# Altium PCB FCM_Integrated.PcbDoc (part 3 of 3)
Units mil, origin at the board's own origin, x right, y up, seen from the top; angles counter-clockwise.
Board outline 5855 x 4354 mil, 4 copper layers (Top Layer, Power, Ground, Bottom Layer), stack 23.756 mil thick; 164 components, 92 nets, 619 pads, 86 vias.
Unrouted connection lines stored in the file: 241.
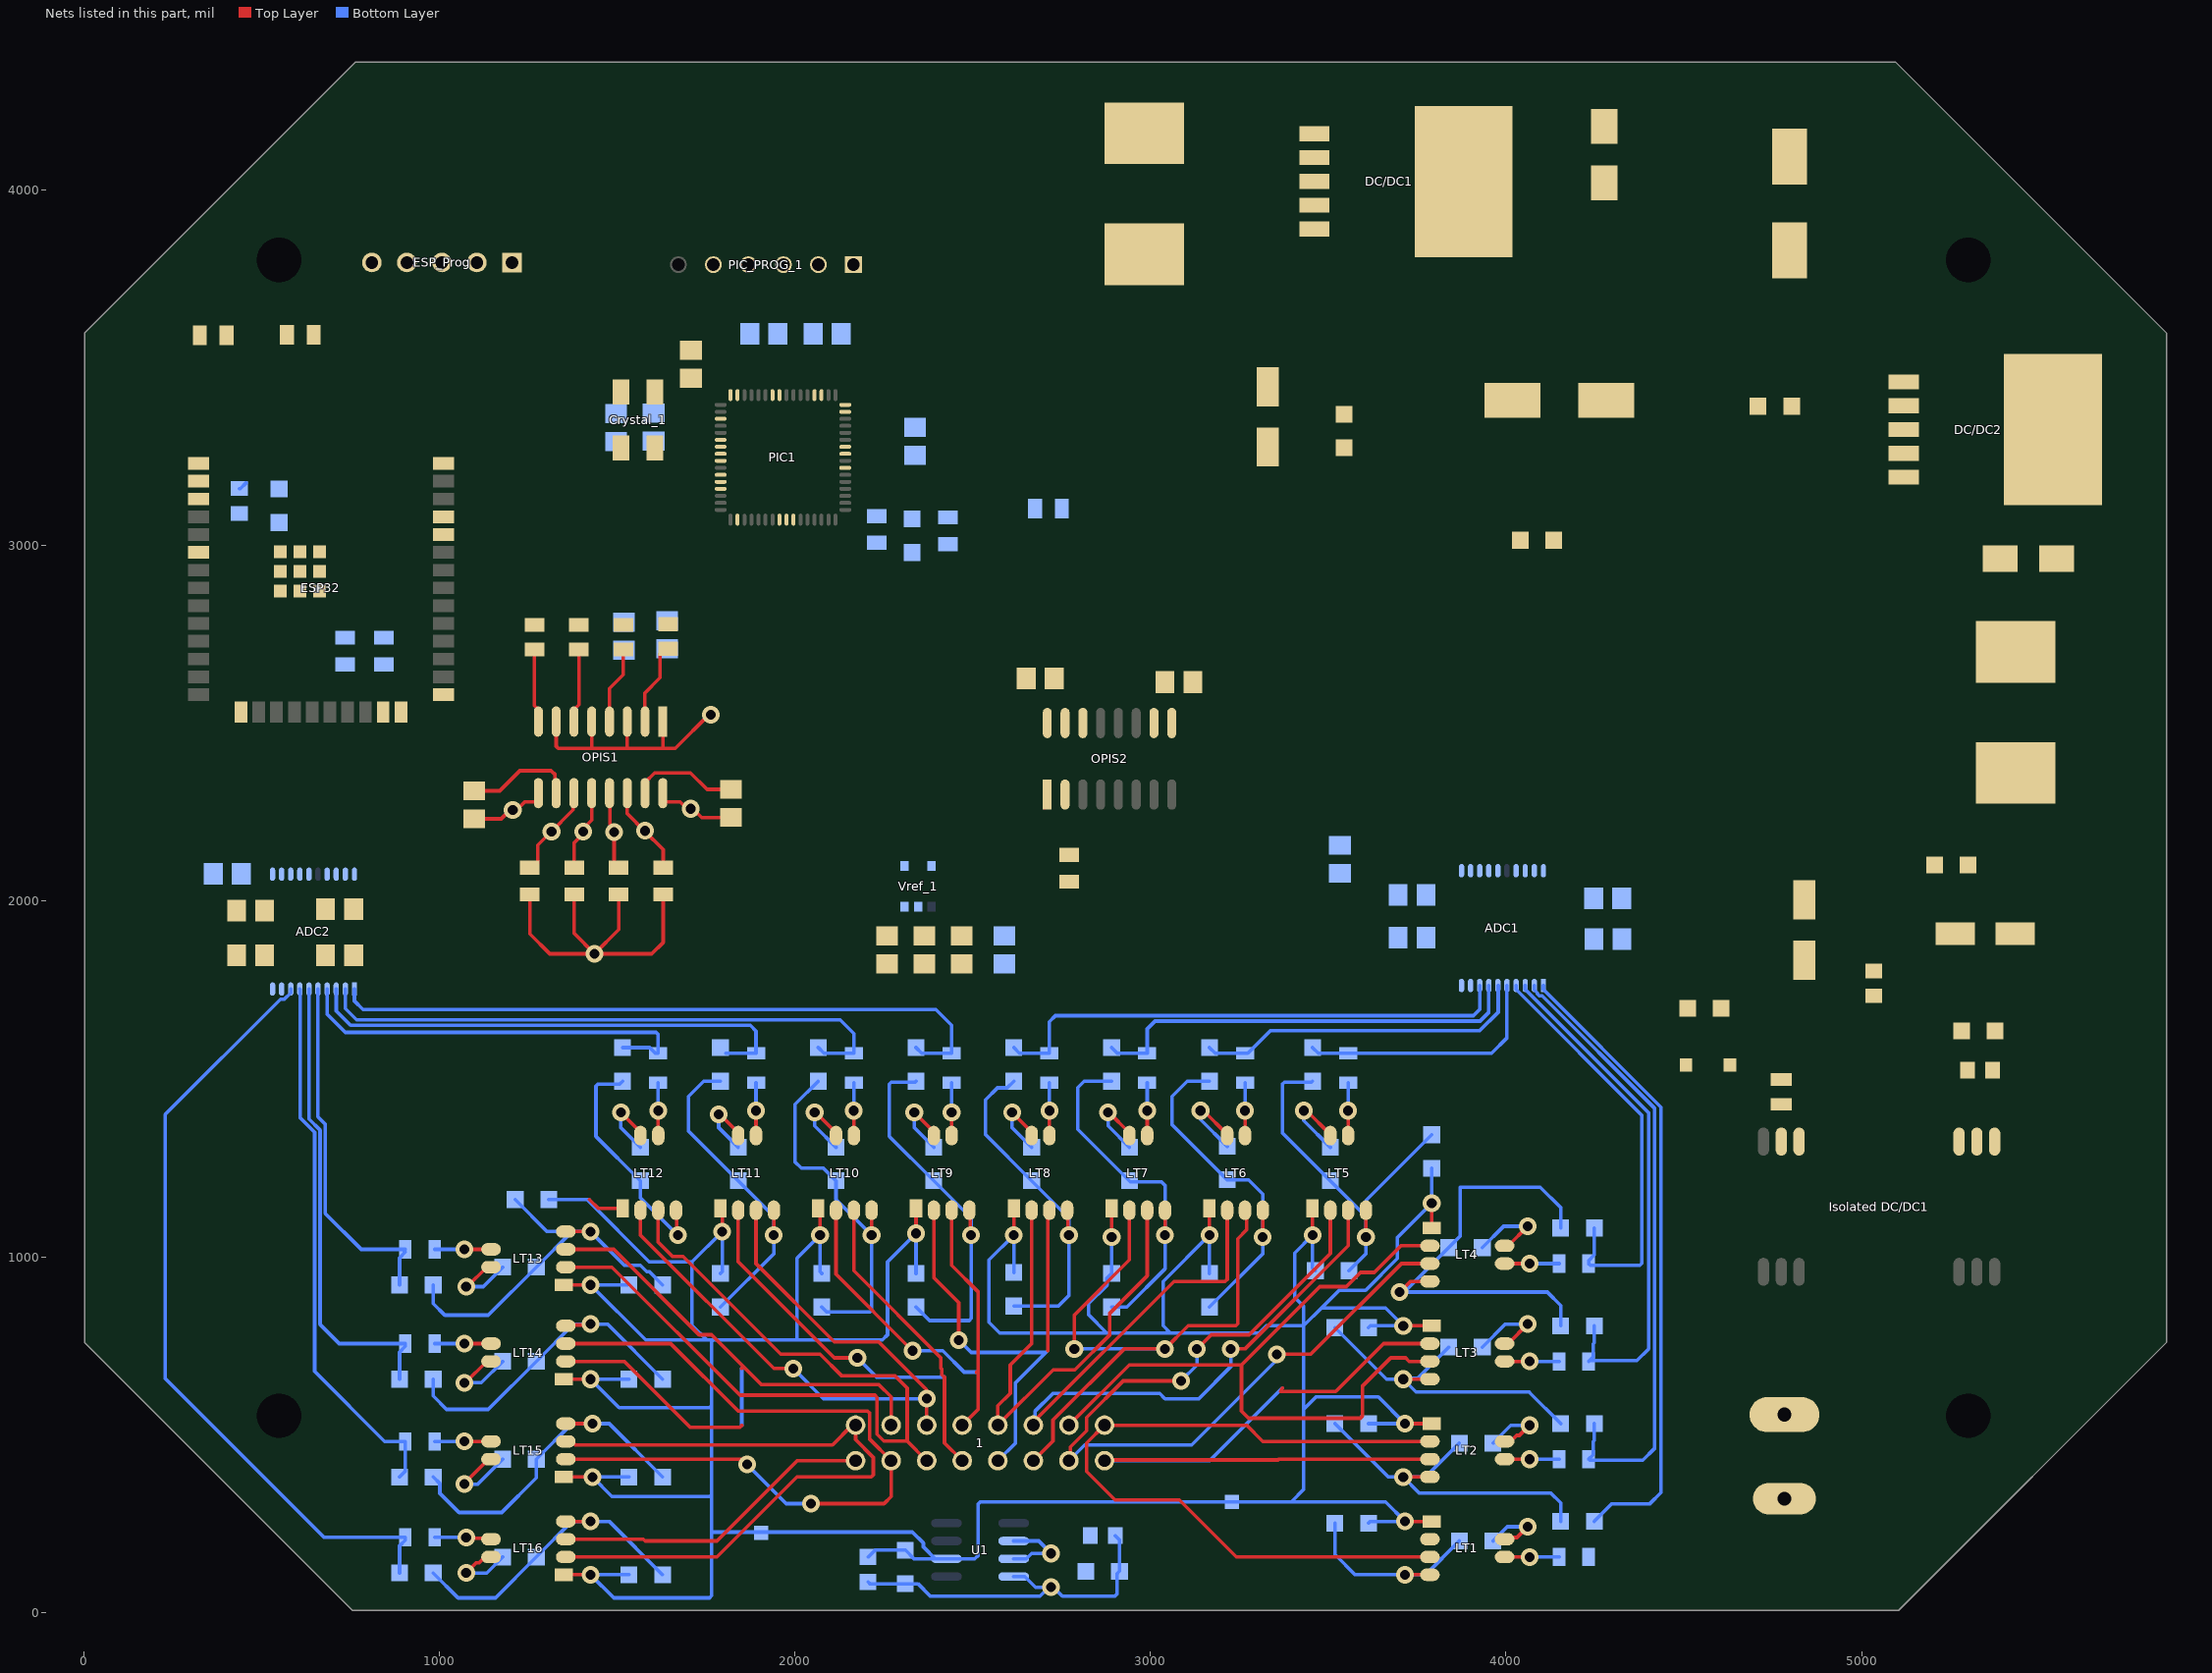
[diagram p4: the nets of this part, all layers, seen from the top]

## Via types
v1: diameter 50, hole 28, Top Layer to Bottom Layer, 86 vias

## Nets (pads, with @x,y where several pads share a name; then routed paths per layer and width w, separated by ;. In a path a pad name is that pad's centre, name@x,y a point inside that pad or via, vN(x,y) a via of type N, cw(c..) or ccw(c..) an arc to the next point about the centre after c; other vN are vias at no path point)
2.048_VDC: C20.2 C21.1 C22.2 C25.2 C28.2 C31.2 C34.2 C37.2 C40.2 C43.2 C46.2 C48.2 C52.2 C54.2 C58.2 C60.2 C64.2 C66.2 LT1.1 LT2.1 LT3.1 LT4.1 LT5.1 LT6.1 LT7.1 LT8.1 LT9.1 LT10.1 LT11.1 LT12.1 LT13.1 LT14.1 LT15.1 LT16.1 pad.1 U1.6 | length 13046
  Top Layer w10: LT16.1@1351,106 v1(1426,106) ; LT15.1@1351,381 v1(1431,381) ; LT14.1@1351,656 v1(1426,656) ; LT13.1@1351,921 v1(1426,921) ; 1422.57,1161 1447.57,1136 LT12.1@1516,1136 ; LT11.1@1791,1136 1796,1131 v1(1796,1071) ; LT10.1@2066,1136 2071,1131 v1(2071,1061) ; v1(2341,1066) LT9.1@2341,1136 ; v1(2616,1061) LT8.1@2616,1136 ; v1(2891,1056) LT7.1@2891,1136 ; v1(3166,1061) LT6.1@3166,1136 ; v1(3456,1061) LT5.1@3456,1136 ; v1(3711,806) LT3.1@3791,806 ; v1(3716,256) LT1.1@3791,256 ; v1(3716,531) LT2.1@3791,531 ; LT4.1@3791,1081 v1(3791,1151)
  Bottom Layer w10: C64.2@1308.24,1161 1416,1161 ; 1422.57,1161 1416,1161 ; C66.2@1533.76,106 v1(1426,106) 1491,41 1760.14,41 1766,46.86 1766,226 ; C60.2@1533.76,381 v1(1431,381) 1486,326 1760.14,326 1766,331.86 ; C54.2@1533.76,656 v1(1426,656) 1506,576 1760.14,576 1766,581.86 ; C48.2@1533.76,921 v1(1426,921) 1581,766 1752.72,766 ; C58.2@1791,953.24 1796,958.24 v1(1796,1071) 1711,986 ; C52.2@2076,953.24 2071,958.24 v1(2071,1061) 2006,996 2006,766 ; C21.1@2206,156 2206.98,156 2226.22,175.24 C20.2@2311,175.24 2335.24,151 U1.6@2395.02,151 ; C46.2@2341,953.24 v1(2341,1066) 2261,986 2261,781 2246,766 2006,766 ; C43.2@2616,956 v1(2616,1061) 2546,991 2546,816 2576,786 2877.27,786 ; v1(2891,1056) C40.2@2891,953.24 2877.98,940.23 2877.98,920.48 2826,868.5 2826,837.27 2877.27,786 ; C37.2@3166,953.24 v1(3166,1061) 3036,931 3036,806 3056,786 ; C34.2@3463.76,961 3456,968.76 v1(3456,1061) 3406,1011 3406,886 3431,861 3431,806 ; C22.2@3613.24,251 3618.24,256 v1(3716,256) 3661,311 3396,311 ; C25.2@3613.24,531 v1(3716,531) 3641,606 3466,606 3431,571 ; C28.2@3613.24,801 3618.24,806 v1(3711,806) 3661,856 3481,856 ; C31.2@3791,1248.76 v1(3791,1151) 3694.24,1054.24 3694.24,995.1 3605.14,906 3531,906 3481,856 ; 1416,1161 1591,986 1711,986 ; 1711,986 1711,807.72 1752.72,766 ; 1752.72,766 1771,766 ; 1766,226 1906,226 2331,226 2361.7,195.3 2361.7,184.31 U1.6@2395.02,151 ; 1766,226 1766,331.86 ; 1766,331.86 1766,581.86 ; 1766,581.86 1766,761 1771,766 ; 1771,766 2006,766 ; U1.6@2395.02,151 U1.6@2426.51,151 2506,151 2516,161 2516,305.14 2521.86,311 pad.1@3229,311 3396,311 ; 2877.27,786 3056,786 ; 3056,786 3306,786 3326,806 3431,806 ; 3396,311 3431,346 3431,571 ; 3431,571 3431,806 ; 3431,806 3481,856
5VDC: "Isolated DC/DC1.1" C74.1 C75.2 C81.1 C82.2 DC/DC2.4 L2.2
+3V3: C7.1 C8.2 C9.2 C72.1 C73.2 C83.1 C85.1 C89.2 C90.2 C91.1 C92.2 DC/DC1.4 ESP32.2 L1.2 OPIS1.1 OPIS1.3 OPIS1.5 OPIS1.7 OPIS2.10 OPIS2.15 PIC1.10 PIC1.19 PIC1.26 PIC1.35 PIC1.38 PIC1.57 PIC_PROG_1.2 R9.2 R13.2 | length 770.8
  Top Layer w10: OPIS1.7@1329,2505 1329,2435.86 1334.86,2430 1426,2430 ; OPIS1.5@1429,2505 1429,2433 1426,2430 ; OPIS1.3@1529,2505 1529,2432 1531,2430 ; OPIS1.1@1629,2505 1629,2430 ; v1@1761,2527 1664,2430 1629,2430 ; 1426,2430 1531,2430 ; 1531,2430 1629,2430
  other v1: 1764,2524
+5: *1.1 ADC1.10 ADC1.12 ADC1.20 ADC2.10 ADC2.12 ADC2.20 C1.1 C2.1 C3.2 C4.2 C5.2 C6.2 C10.1 C12.2 C13.2 C14.1 C15.1 C16.2 C17.2 C18.1 C19.1 C23.2 C26.2 C29.2 C32.2 C35.2 C38.2 C41.2 C44.2 C47.2 C49.2 C53.2 C55.2 C59.2 C61.2 C65.2 C67.2 C76.1 C77.1 C78.2 DIODE2.K LT1.7 LT2.7 LT3.7 LT4.7 LT5.7 LT6.7 LT7.7 LT8.7 LT9.7 LT10.7 LT11.7 LT12.7 LT13.7 LT14.7 LT15.7 LT16.7 OPIS1.10 OPIS1.15 OPIS2.1 R5.1 R6.1 R7.1 R8.1 U1.2 U1.3 Vref_1.3 Vref_1.4 | length 5442
  Top Layer w10: v1@1071,363.53 1138.47,431 LT15.7@1146,431 ; v1@1073.47,646 1133.47,706 LT14.7@1146,706 ; v1(1076,111) 1104.28,139.28 1112.46,139.28 1129.18,156 LT16.7@1146,156 ; v1@1078.47,916 1133.47,971 LT13.7@1146,971 ; C6.2@1099,2310.37 1170.37,2310.37 1227,2367 1315,2367 1326.09,2355.91 1326.09,2306.73 OPIS1.10@1329,2303.82 ; R5.1@1255,2019 1255,1908 1311,1852 v1(1437,1852) ; R6.1@1380,2019 1380,1909 v1(1437,1852) ; R7.1@1505,2019 1505,1920 v1(1437,1852) ; v1(1511,1406) 1566,1351.03 LT12.7@1566,1341 ; OPIS1.15@1579,2303.82 1579,2333.74 1606.26,2361 1707,2361 1753.63,2314.37 C5.2@1820,2314.37 ; R8.1@1630,2019 1630,1884 1598,1852 v1(1437,1852) ; v1(1786,1401) 1788.53,1401 1841,1348.53 LT11.7@1841,1341 ; v1(2056,1406) 2058.53,1406 2116,1348.53 LT10.7@2116,1341 ; v1(2336,1406) 2391,1351.03 LT9.7@2391,1341 ; v1(2611,1406) 2666,1351.03 LT8.7@2666,1341 ; OPIS2.1@2702.4,2262.3 2710,2269.9 OPIS2.1@2710,2299.82 ; v1@2883.53,1406 2941,1348.53 LT7.7@2941,1341 ; v1@3149.29,1411 3216,1344.29 LT6.7@3216,1341 ; v1@3439.29,1411 3506,1344.29 LT5.7@3506,1341 ; LT1.7@3996,206 4000.78,210.78 4030.78,210.78 v1(4061,241) ; LT2.7@3996,481 4012.82,481 4029.54,497.72 4037.72,497.72 v1(4066,526) ; LT3.7@3996,756 4006.03,756 v1(4061,811) ; LT4.7@3996,1031 4006.03,1031 v1(4061,1086)
  Bottom Layer w10: v1@1071,363.53 v1(1071,361) 1108.76,361 C61.2@1178.76,431 ; v1(1071,646) 1118.76,646 C55.2@1178.76,706 ; v1(1076,111) 1133.76,111 C67.2@1178.76,156 ; v1(1076,916) 1123.76,916 C49.2@1178.76,971 ; v1(1511,1406) 1511,1363.24 C65.2@1566,1308.24 ; v1(1786,1401) 1786,1363.24 C59.2@1841,1308.24 ; v1(2056,1406) 2056,1368.24 C53.2@2116,1308.24 ; v1(2336,1406) 2336,1363.24 C47.2@2391,1308.24 ; v1(2611,1406) 2611,1363.24 C44.2@2666,1308.24 ; U1.3@2615.49,151 2650.67,151 2665.67,166 v1(2721,166) 2686,201 U1.2@2615.49,201 ; v1@2883.53,1406 v1(2881,1406) 2881,1368.24 C41.2@2941,1308.24 ; v1@3149.29,1411 v1(3141,1411) 3141,1386 C38.2@3216,1311 ; v1@3439.29,1411 v1(3431,1411) 3431,1383.24 C35.2@3506,1308.24 ; C29.2@3933.24,746 3998.24,811 v1(4061,811) ; C32.2@3933.24,1026 3993.24,1086 v1(4061,1086) ; C23.2@3963.24,201 4003.24,241 v1(4061,241) ; C26.2@3963.24,476 4013.24,526 v1(4066,526)
+12: C70.2 C71.1 C79.2 C80.1 DC/DC1.2 DC/DC2.2 J1.1
CathH1: OPIS1.2 R4.1 | length 237.4
  Top Layer w10: OPIS1.2@1579,2505 1578,2506 1578,2585 1621.44,2628.44 1621.44,2695.31 1636.13,2710 R4.1@1644,2710
CathH2: OPIS1.4 R3.1 | length 219
  Top Layer w10: OPIS1.4@1479,2505 1479,2598 1517.94,2636.94 R3.1@1517.94,2707.91
CathH3: OPIS1.6 R2.1 | length 208.7
  Top Layer w10: OPIS1.6@1379,2505 1379,2539.03 1392.94,2552.97 R2.1@1392.94,2707.91
CathH4: OPIS1.8 R1.1 | length 207.5
  Top Layer w10: R1.1@1267.94,2707.91 1267.94,2550.1 1279,2539.03 OPIS1.8@1279,2505
CathL1: OPIS2.2 R11.2
Cell_1_Voltage: ADC1.1 C24.2 R16.2 | length 1784.4
  Bottom Layer w10: ADC1.1@4105.13,1763 4105.13,1751.78 4436,1420.91 4436,336.86 4404.88,305.74 4297.98,305.74 C24.2@4248.24,256
Cell_2_Voltage: ADC1.2 C27.2 R17.2 | length 1753.4
  Bottom Layer w10: ADC1.2@4079.54,1763 4079.54,1750.44 4087.56,1742.42 4087.56,1740.25 4093.51,1734.3 4101.4,1734.3 4417.35,1418.35 4417.35,460.35 4385,428 4235.34,428 R17.2@4232.34,431 4245.05,443.72 4245.05,480.39 4248.24,483.58 C27.2@4248.24,531
Cell_3_Voltage: ADC1.3 C30.2 R18.2 | length 1452.7
  Bottom Layer w10: ADC1.3@4053.95,1763 4053.95,1751.78 4401,1404.73 4401,741 4368,708 R18.2@4234.34,708 ; R18.2@4232.34,706 R18.2@4234.34,708 ; C30.2@4248.24,806 4248.24,758.58 4245.05,755.39 4245.05,718.72 R18.2@4234.34,708
Cell_4_Voltage: ADC1.4 C33.2 R19.2 | length 1188.4
  Bottom Layer w10: ADC1.4@4028.36,1763 4028.36,1751.78 4382,1398.14 4382,981.86 4376.14,976 4237.34,976 R19.2@4232.34,981 4232.34,988.87 4248.24,1004.78 C33.2@4248.24,1081
Cell_5_Voltage: ADC1.5 C36.2 R20.2 | length 718.6
  Bottom Layer w10: C36.2@3456,1588.24 3471.91,1572.34 R20.2@3556,1572.34 3959.34,1572.34 4002.77,1615.77 ADC1.5@4002.77,1763
Cell_6_Voltage: ADC1.6 C39.2 R21.2 | length 941.9
  Bottom Layer w10: C39.2@3166,1588.24 3181.91,1572.34 R21.2@3266,1572.34 3273.87,1572.34 3337.99,1636.46 3926.6,1636.46 3978,1687.86 3978,1762.18 ADC1.6@3977.18,1763
Cell_7_Voltage: ADC1.7 C42.2 R22.2 | length 1230.5
  Bottom Layer w10: C42.2@2891,1588.24 2906.91,1572.34 R22.2@2991,1572.34 2991,1641 3013,1663 3927,1663 3951.59,1687.59 ADC1.7@3951.59,1763
Cell_8_Voltage: ADC1.8 C45.2 R23.2 | length 1486.7
  Bottom Layer w10: C45.2@2616,1588.24 2631.91,1572.34 R23.2@2716,1572.34 2716,1661 2733,1678 3908,1678 3926,1696 ADC1.8@3926,1763
Cell_9_Voltage: ADC2.1 C50.2 R24.2 | length 1926.5
  Bottom Layer w10: ADC2.1@761.77,1753 761.77,1719.3 785.92,1695.15 2396.85,1695.15 2441,1651 R24.2@2441,1572.34 2356.91,1572.34 C50.2@2341,1588.24
Cell_10_Voltage: ADC2.2 C56.2 R26.2 | length 1676.2
  Bottom Layer w10: ADC2.2@736.18,1753 736.18,1697.82 768,1666 2128,1666 2166,1628 R26.2@2166,1572.34 2081.91,1572.34 C56.2@2066,1588.24
Cell_11_Voltage: ADC2.3 C62.2 R28.2 | length 1412.1
  Bottom Layer w10: ADC2.3@710.59,1753 710.59,1691.41 751,1651 1875,1651 1891,1635 R28.2@1891,1572.34 C62.2@1806.91,1572.34
Cell_12_Voltage: ADC2.4 C68.2 R30.2 | length 1184.9
  Bottom Layer w10: ADC2.4@685,1753 685,1682 736,1631 1610.14,1631 1616,1625.14 R30.2@1616,1572.34 1608.13,1572.34 1592.22,1588.24 C68.2@1516,1588.24
Cell_13_Voltage: ADC2.5 C51.2 R25.2 | length 1010.6
  Bottom Layer w10: ADC2.5@659.41,1753 659,1752.59 659,1394 680,1373 680,1122 781,1021 R25.2@904.66,1021 ; C51.2@888.76,921 888.76,997.22 904.66,1013.13 R25.2@900.73,1017.06
Cell_14_Voltage: ADC2.6 C57.2 R27.2 | length 1324.5
  Bottom Layer w10: ADC2.6@633.82,1753 633.82,1387.4 665,1356.21 665,810 719,756 R27.2@904.66,756 904.66,748.13 888.76,732.22 C57.2@888.76,656
Cell_15_Voltage: ADC2.7 C63.2 R29.2 | length 1535.2
  Bottom Layer w10: ADC2.7@608.23,1753 609,1752.23 609,1391 650,1350 650,678 847,481 R29.2@904.66,481 904.66,396.91 C63.2@888.76,381
Cell_16_Voltage: ADC2.8 C69.2 R31.2 | length 2213.5
  Bottom Layer w10: ADC2.8@582.64,1753 582.64,1742.65 564.29,1724.3 553.94,1724.3 230,1400.36 230,658 677,211 R31.2@904.66,211 904.66,203.13 888.76,187.22 C69.2@888.76,111
Chipsel1_HS: ADC1.18 OPIS1.12 R6.2 | length 230.1
  Top Layer w10: R6.2@1380,2094 1380,2164.43 1405,2189.43 v1(1405,2196) 1405,2204.57 1429,2228.57 OPIS1.12@1429,2303.82
Chipsel1_LS: PIC1.43 R2.2
Chipsel2_HS: ADC2.18 OPIS1.14 R8.2 | length 251.7
  Top Layer w10: OPIS1.14@1529,2303.82 1529,2246 1579,2196 1630,2145 R8.2@1630,2094
  other v1: 1579,2198
Chipsel2_LS: PIC1.31 R4.2
D_CLK_LS: PIC1.50 R1.2
D_In_HS: ADC1.17 ADC2.17 OPIS1.13 R7.2 | length 220.6
  Top Layer w10: OPIS1.13@1479,2303.82 1480.33,2302.49 1480.33,2216.49 1492,2204.82 1492,2107 R7.2@1505,2094
  other v1: 1492,2194
D_in_LS: PIC1.32 R3.2
D_out_HS: ADC1.15 ADC2.15 R11.1
D_out_L: OPIS2.14 PIC1.58 R9.1
DCLK_HS: ADC1.19 ADC2.19 OPIS1.11 R5.2 | length 265.8
  Top Layer w10: R5.2@1255,2094 1262.87,2094 1277.56,2108.69 1277.56,2157.56 1342,2222 1342,2223 1376.43,2257.43 1376.43,2301.25 OPIS1.11@1379,2303.82
  other v1: 1316,2196
ESP_Boot_D: ESP32.25 R32.1
ESP_Boot_P: ESP_Prog.4 R32.2
ESP_Enable_D: ESP32.3 R15.2
ESP_Enable_P: ESP_Prog.5 R15.1
ESP_TX_BOOT: ESP32.35 ESP_Prog.2
ESPout-PICin: PIC1.44 R10.2
GND: 
GND_H: "Isolated DC/DC1.4" ADC1.9 ADC1.13 ADC1.14 ADC2.9 ADC2.13 ADC2.14 C1.2 C2.2 C3.1 C4.1 C5.1 C6.1 C10.2 C11.1 C12.1 C13.1 C14.2 C15.2 C16.1 C17.1 C18.2 C19.2 C20.1 C21.2 C22.1 C23.1 C24.1 C25.1 C26.1 C27.1 C28.1 C29.1 C30.1 C31.1 C32.1 C33.1 C34.1 C35.1 C36.1 C37.1 C38.1 C39.1 C40.1 C41.1 C42.1 C43.1 C44.1 C45.1 C46.1 C47.1 C48.1 C49.1 C50.1 C51.1 C52.1 C53.1 C54.1 C55.1 C56.1 C57.1 C58.1 C59.1 C60.1 C61.1 C62.1 C63.1 C64.1 C65.1 C66.1 C67.1 C68.1 C69.1 C76.2 C77.2 C78.1 C93.1 C94.1 DIODE2.A LT1.2 LT1.4 LT2.4 LT3.4 LT4.4 LT5.4 LT6.4 LT7.4 LT8.4 LT9.4 LT10.4 LT11.4 LT12.4 LT13.4 LT14.4 LT15.4 LT16.4 OPIS1.9 OPIS1.16 U1.4 Vref_1.2 | length 17192.6
  Top Layer w10: C6.1@1099,2231.63 1174.8,2231.63 1199.17,2256 v1(1207,2256) 1217.77,2256 1240.67,2278.9 1271.98,2278.9 1279,2285.92 OPIS1.9@1279,2303.82 ; LT16.4@1356,256 v1(1426,256) ; LT15.4@1356,531 v1(1431,531) ; LT14.4@1356,806 1358.5,808.5 1423.5,808.5 v1(1426,811) ; LT13.4@1356,1071 v1(1426,1071) ; OPIS1.16@1629,2303.82 1629,2285.92 1636.02,2278.9 1677.28,2278.9 1696.18,2260 1713.57,2260 1738.57,2235 C5.1@1818,2235 ; LT12.4@1666,1131 1668.5,1128.5 1668.5,1063.5 v1(1671,1061) ; v1(1941,1061) LT11.4@1941,1131 ; v1(2216,1061) LT10.4@2216,1131 ; LT9.4@2491,1131 2493.5,1128.5 2493.5,1063.5 v1(2496,1061) ; LT8.4@2766,1131 2768.5,1128.5 2768.5,1063.5 v1(2771,1061) ; v1(3041,1061) LT7.4@3041,1131 ; v1(3316,1056) LT6.4@3316,1131 ; v1(3606,1056) LT5.4@3606,1131 ; v1(3701,901) 3731,931 LT4.4@3786,931 ; v1(3711,381) LT2.4@3786,381 ; v1(3711,656) LT3.4@3786,656 ; v1(3716,106) LT1.4@3786,106
  Bottom Layer w10: C69.1@983.24,111 1053.24,41 1158.24,41 C67.1@1273.24,156 1373.24,256 v1(1426,256) 1478.24,256 C66.1@1628.24,106 ; C63.1@983.24,381 1001.87,362.38 1001.87,335.13 1056,281 1176,281 1273.24,378.24 C61.1@1273.24,431 1373.24,531 v1(1431,531) 1478.24,531 C60.1@1628.24,381 ; C57.1@983.24,656 983.24,608.76 1021,571 1138.24,571 C55.1@1273.24,706 1378.24,811 v1(1426,811) 1473.24,811 C54.1@1628.24,656 ; C51.1@983.24,921 983.24,868.76 1016,836 1138.24,836 C49.1@1273.24,971 1373.24,1071 ; C64.1@1213.76,1161 1303.76,1071 1373.24,1071 ; C68.1@1516,1493.76 1508.24,1486 1446.86,1486 1441,1480.14 1441,1338.76 C65.1@1566,1213.76 1566,1166 v1(1671,1061) ; C48.1@1628.24,921 1591.43,957.81 1584.19,957.81 1566,976 1521,976 v1(1426,1071) 1373.24,1071 ; C58.1@1791,858.76 1941,1008.76 v1(1941,1061) 1941,1113.76 C59.1@1841,1213.76 1701,1353.76 1701,1451 1743.76,1493.76 C62.1@1791,1493.76 ; C56.1@2066,1493.76 2001,1428.76 2001,1266.86 2018.24,1249.62 2080.14,1249.62 C53.1@2116,1213.76 2116,1161 v1(2216,1061) 2216,851 2216.86,850.14 2211.86,845.14 2089.61,845.14 C52.1@2076,858.76 ; C21.2@2206,86 2211.25,80.75 C20.1@2311,80.75 2346.25,80.75 2381,46 2689.43,46 v1@2714.43,71 ; C46.1@2341,858.76 2378.76,821 2490.14,821 2496,826.86 v1(2496,1061) 2496,1108.76 C47.1@2391,1213.76 2266,1338.76 2266,1485.14 2271.86,1491 2338.24,1491 C50.1@2341,1493.76 ; U1.4@2615.49,101 2646.98,101 2676.98,71 v1@2714.43,71 ; C43.1@2616,861.51 2741.51,861.51 2771,891 v1(2771,1061) 2771,1108.76 C44.1@2666,1213.76 2536,1343.76 2536,1441 2570.13,1475.13 2597.38,1475.13 C45.1@2616,1493.76 ; C40.1@2891,858.76 2933.76,858.76 3041,966 v1(3041,1061) 3041,1201 3031,1211 2943.76,1211 C41.1@2941,1213.76 2796,1358.76 2796,1476 2813.76,1493.76 C42.1@2891,1493.76 ; C18.2@2901,216 2913.24,203.76 C19.2@2913.24,116 2906,108.76 2906,51.86 2900.14,46 2752.57,46 2727.57,71 v1(2721,71) v1@2714.43,71 ; C37.1@3166,858.76 3316,1008.76 v1(3316,1056) 3316,1176 3276,1216 3216.51,1216 C38.1@3216,1216.51 3061,1371.51 3061,1451 3103.76,1493.76 C39.1@3166,1493.76 ; C36.1@3456,1493.76 3453.24,1491 3376.86,1491 3371,1485.14 3371,1348.76 C35.1@3506,1213.76 3606,1113.76 ; C22.1@3518.76,251 3518.76,163.24 3576,106 v1(3716,106) 3773.76,106 C23.1@3868.76,201 ; C25.1@3518.76,531 3668.76,381 v1(3711,381) ; C28.1@3518.76,801 3663.76,656 v1(3711,656) ; C34.1@3558.24,961 3606,1008.76 v1(3606,1056) 3606,1113.76 ; v1(3701,901) 4116,901 4153.76,863.24 C30.1@4153.76,806 ; v1@3708.65,908.65 3721.41,908.65 C32.1@3838.76,1026 3871,1058.24 3871,1196 4096,1196 4153.76,1138.24 C33.1@4153.76,1081 ; C31.1@3791,1343.24 3606,1158.24 3606,1113.76 ; C29.1@3838.76,746 3751,658.24 3713.24,658.24 v1(3711,656) ; C26.1@3868.76,476 3773.76,381 v1(3711,381) ; C24.1@4153.76,256 4153.76,308.24 4126,336 3756,336 v1(3711,381) ; C27.1@4153.76,531 4066,618.76 4066,620.14 3746.86,620.14 v1(3711,656)
  other v1: 1707,2260
GND_L: "Isolated DC/DC1.2" "Isolated DC/DC1.3" C7.2 C8.1 C9.1 C70.1 C71.2 C72.2 C73.1 C74.2 C75.1 C79.1 C80.2 C81.2 C82.1 C83.2 C84.2 C85.2 C86.2 C87.1 C88.2 C89.1 C90.1 C91.2 C92.1 Crystal_1.2 Crystal_1.4 DC/DC1.3 DC/DC1.5 DC/DC1.6 DC/DC2.3 DC/DC2.5 DC/DC2.6 DIODE1.A DIODE3.A ESP32.1 ESP32.15 ESP32.38 ESP32.39 ESP_Prog.3 J1.2 OPIS2.9 OPIS2.16 PIC1.9 PIC1.20 PIC1.25 PIC1.41 PIC_PROG_1.3 | length 25.1
  Bottom Layer w10: C83.2@438,3160 440.95,3160 C83.2@456.62,3175.67
MCLR: PIC1.7 PIC_PROG_1.1 R14.2
Net1_1: 1.1 LT1.3 LT2.2 | length 2149.7
  Top Layer w10: LT1.3@3786,156 3241.67,156 3081.67,316 2901,316 2821,396 2821,476.67 1.1@2871,526.67 3270.33,526.67 3316,481 LT2.2@3786,481
Net1_2: 1.2 LT2.3 LT3.2 | length 1988.5
  Top Layer w10: 1.2@2871,426.67 2873.17,428.84 3358.84,428.84 3361,431 LT2.3@3786,431 ; 3371,631 3366,621 3521,621 3656,756 LT3.2@3786,756
  Bottom Layer w10: 1.2@2871,426.67 3166.67,426.67 3371,631
Net1_3: 1.3 LT3.3 LT4.2 | length 2016
  Top Layer w10: 1.3@2771,526.67 2940.33,696 3256,696 ; LT3.3@3786,706 3727.59,706 3717.59,716 3676,716 3596,636 3596,551.86 3590.14,546 3276,546 3256,566 3256,696 ; LT4.2@3786,1031 3704.65,1031 3629.65,956 3591,956 3551,916 3476,916 3256,696
Net1_4: 1.4 LT4.3 LT5.2 | length 2419.8
  Top Layer w10: 1.4@2771,426.67 2775.29,430.96 2775.29,465.29 2821,511 2821,548.39 2923.61,651 v1(3086,651) ; v1(3131,741) 3171,781 3277.72,781 3506,1009.28 LT5.2@3506,1131 ; v1(3356,726) 3451,726 3706,981 LT4.3@3786,981
  Bottom Layer w10: 1.4@2771,426.67 2815.33,471 3116,471 3356,711 v1(3356,726) ; v1(3086,651) 3131,696 v1(3131,741)
Net1_5: 1.5 LT5.3 LT6.2 | length 2170.2
  Top Layer w10: 1.5@2671,526.67 2671,536 3066,931 3210.14,931 3216,936.86 LT6.2@3216,1131 ; v1(3226,741) 3266,741 3556,1031 LT5.3@3556,1131
  Bottom Layer w10: 1.5@2671,526.67 2675.29,530.96 2675.29,565.29 2726,616 3026,616 3041,601 3136,601 3226,691 v1(3226,741)
Net1_6: 1.6 LT6.3 LT7.2 | length 1810.1
  Top Layer w10: 1.6@2671,426.67 2726,481.67 2726,541 2926,741 v1(3041,741) 3106,806 3240.14,806 3246,811.86 3246,1051 3271,1076 3271,1089.18 3270.78,1089.39 3270.78,1126.22 LT6.3@3266,1131 ; v1(2786,741) 2786,836 2941,991 LT7.2@2941,1131
  Bottom Layer w10: v1(2786,741) v1(3041,741)
Net1_7: 1.7 LT7.3 LT8.2 | length 1457.5
  Top Layer w10: LT8.2@2666,1131 2666,756 2606,696 2606,616 2571,581 1.7@2571,526.67 2726.71,682.38 2787.38,682.38 2886,781 2886,841.67 2991,946.67 LT7.3@2991,1131
Net1_8: 1.8 LT8.3 LT9.2 | length 1417.9
  Top Layer w10: LT9.2@2391,1131 2391,941 2461,871 v1(2461,766) ; 2711.22,736.22 2711.22,1126.22 LT8.3@2716,1131
  Bottom Layer w10: v1(2461,766) 2496,731 2706,731 ; 1.8@2571,426.67 2621,476.67 2621,646 2706,731 ; 2711.22,736.22 2706,731
Net1_9: 1.9 LT9.3 LT10.2 | length 1350
  Top Layer w10: LT10.2@2116,1131 2116,951 v1(2331,736) ; LT9.3@2441,1131 2441,976 2516,901 2516,671 ; 1.9@2471,526.67 2516,571.67 2516,671 ; 2511,676 2516,671
  Bottom Layer w10: v1(2331,736) 2416,736 2476,676 2511,676
Net1_10: 1.10 LT10.3 LT11.2 | length 1701.1
  Top Layer w10: LT11.2@1841,1131 1841,986 2111,716 v1(2176,716) ; LT10.3@2166,1131 2166,961 2411,716 2411,686.86 2413.35,684.51 2413.35,668.65 2421,661 2421,476.67 1.10@2471,426.67
  Bottom Layer w10: v1(2176,716) 2231,661 2421,661 2413.35,668.65
Net1_11: 1.11 LT11.3 LT12.2 | length 1941.9
  Top Layer w10: LT12.2@1566,1131 1566,1061 1941,686 v1(1996,686) ; LT11.3@1891,1131 1891,981 2111,761 2236,761 2371,626 v1(2371,601) 1.11@2371,526.67
  Bottom Layer w10: v1(1996,686) 2081,601 v1(2371,601)
Net1_12: 1.12 LT12.3 LT13.2 | length 2410.6
  Top Layer w10: LT13.2@1356,971 1486,971 1846,611 2225.14,611 2231,605.14 2231,501 2250.33,481.67 2316,481.67 ; LT12.3@1616,1131 1616,1041 1656,1001 1686,1001 1961,726 2071,726 2131,666 2281,666 2316,631 2316,481.67 ; 1.12@2371,426.67 2316,481.67
Net1_13: 1.13 LT13.3 LT14.2 | length 1907
  Top Layer w10: LT14.2@1356,706 1521,706 1706,521 1846,521 1851,526 ; LT13.3@1356,1021 1491,1021 1731,781 1766,781 1856,691 ; 1851,686 1856,691 ; 1.13@2271,526.67 2271,606 2236,641 1906,641 1856,691
  Bottom Layer w10: 1851,526 1851,686
Net1_14: 1.14 LT14.3 LT15.2 | length 2170.2
  Top Layer w10: LT15.2@1356,431 1851,431 v1(1866,416) ; LT14.3@1356,756 1651,756 1841,566 2205.14,566 2211,560.14 2211,486.67 1.14@2271,426.67 2271,326 2251,306 v1(2046,306)
  Bottom Layer w10: v1(1866,416) 1976,306 v1(2046,306)
Net1_15: 1.15 LT15.3 LT16.2 | length 1963.3
  Top Layer w10: LT16.2@1356,156 1781,156 2006,381 2215.14,381 2221,386.86 2221,436 2171,486 1.15@2171,526.67 2161.67,526.67 2106,471 1382.82,471 1372.82,481 LT15.3@1356,481
Net1_16: 1.16 LT16.3 | length 910.5
  Top Layer w10: LT16.3@1356,206 1574.41,206 1579.41,201 1781,201 2006.67,426.67 1.16@2171,426.67
Net*1_2: "Isolated DC/DC1.5" *1.2 | length 8.6
  Top Layer w10: *1.2@4774,1429 *1.2@4780.06,1422.94
NetC84_1: C84.1 R13.1 R14.1
NetC86_1: C86.1 Crystal_1.3 PIC1.40
NetC87_2: C87.2 Crystal_1.1 PIC1.39 | length 6.8
  Top Layer w8: Crystal_1.1@1510.76,3411.93 Crystal_1.1@1510.76,3418.74
NetC88_1: C88.1 PIC1.56
NetDC/DC1_1: DC/DC1.1 DIODE1.K L1.1
NetDC/DC2_1: DC/DC2.1 DIODE3.K L2.1
NetESP32_23: ESP32.23 R12.1
NetESP32_24: ESP32.24 R10.1
NetESP32_34: ESP32.34 ESP_Prog.1
NetLT1_6: LT1.6 R16.1 | length 153.7
  Top Layer w10: LT1.6@3996,156 v1(4066,156)
  Bottom Layer w10: v1(4066,156) R16.1@4149.66,156
NetLT2_6: LT2.6 R17.1 | length 153.7
  Top Layer w10: LT2.6@3996,431 v1(4066,431)
  Bottom Layer w10: v1(4066,431) R17.1@4149.66,431
NetLT3_6: LT3.6 R18.1 | length 153.7
  Top Layer w10: LT3.6@3996,706 v1(4066,706)
  Bottom Layer w10: v1(4066,706) R18.1@4149.66,706
NetLT4_6: LT4.6 R19.1 | length 153.7
  Top Layer w10: LT4.6@3996,981 v1(4066,981)
  Bottom Layer w10: v1(4066,981) R19.1@4149.66,981
NetLT5_6: LT5.6 R20.1 | length 148.7
  Top Layer w10: LT5.6@3556,1341 v1(3556,1411)
  Bottom Layer w10: v1(3556,1411) R20.1@3556,1489.66
NetLT6_6: LT6.6 R21.1 | length 148.7
  Top Layer w10: LT6.6@3266,1341 v1(3266,1411)
  Bottom Layer w10: v1(3266,1411) R21.1@3266,1489.66
NetLT7_6: LT7.6 R22.1 | length 148.7
  Top Layer w10: LT7.6@2991,1341 v1(2991,1411)
  Bottom Layer w10: v1(2991,1411) R22.1@2991,1489.66
NetLT8_6: LT8.6 R23.1 | length 148.7
  Top Layer w10: LT8.6@2716,1341 v1(2716,1411)
  Bottom Layer w10: v1(2716,1411) R23.1@2716,1489.66
NetLT9_6: LT9.6 R24.1 | length 148.7
  Top Layer w10: LT9.6@2441,1341 v1(2441,1406)
  Bottom Layer w10: v1(2441,1406) R24.1@2441,1489.66
NetLT10_6: LT10.6 R26.1 | length 148.7
  Top Layer w10: LT10.6@2166,1341 v1(2166,1411)
  Bottom Layer w10: v1(2166,1411) R26.1@2166,1489.66
NetLT11_6: LT11.6 R28.1 | length 148.7
  Top Layer w10: LT11.6@1891,1341 v1(1891,1411)
  Bottom Layer w10: v1(1891,1411) R28.1@1891,1489.66
NetLT12_6: LT12.6 R30.1 | length 148.7
  Top Layer w10: LT12.6@1616,1341 v1(1616,1411)
  Bottom Layer w10: v1(1616,1411) R30.1@1616,1489.66
NetLT13_6: LT13.6 R25.1 | length 158.7
  Top Layer w10: v1(1071,1021) LT13.6@1146,1021
  Bottom Layer w10: R25.1@987.34,1021 v1(1071,1021)
NetLT14_6: LT14.6 R27.1 | length 158.7
  Top Layer w10: v1(1071,756) LT14.6@1146,756
  Bottom Layer w10: R27.1@987.34,756 v1(1071,756)
NetLT15_6: LT15.6 R29.1 | length 158.7
  Top Layer w10: v1(1071,481) LT15.6@1146,481
  Bottom Layer w10: R29.1@987.34,481 v1(1071,481)
NetLT16_6: LT16.6 R31.1 | length 160.7
  Top Layer w10: v1(1076,211) 1078.5,208.5 1143.5,208.5 LT16.6@1146,206
  Bottom Layer w10: R31.1@987.34,211 v1(1076,211)
PGEC1: PIC1.15 PIC_PROG_1.5
PGED1: PIC1.16 PIC_PROG_1.4
PICout-ESPin: PIC1.45 R12.2
V_Ref: ADC1.11 ADC2.11 C11.2 C93.2 C94.2 Vref_1.5
pads on no net: "Isolated DC/DC1.6" "Isolated DC/DC1.7" "Isolated DC/DC1.8" "Isolated DC/DC1.9" "Isolated DC/DC1.10" "Isolated DC/DC1.11" "Isolated DC/DC1.12" ADC1.16 ADC2.16 ESP32.4 ESP32.5 ESP32.7 ESP32.8 ESP32.9 ESP32.10 ESP32.11 ESP32.12 ESP32.13 ESP32.14 ESP32.16 ESP32.17 ESP32.18 ESP32.19 ESP32.20 ESP32.21 ESP32.22 ESP32.26 ESP32.27 ESP32.28 ESP32.29 ESP32.30 ESP32.31 ESP32.32 ESP32.33 ESP32.36 ESP32.37 OPIS2.3 OPIS2.4 OPIS2.5 OPIS2.6 OPIS2.7 OPIS2.8 OPIS2.11 OPIS2.12 OPIS2.13 PIC1.1 PIC1.2 PIC1.3 PIC1.4 PIC1.5 PIC1.6 PIC1.8 PIC1.11 PIC1.12 PIC1.13 PIC1.14 PIC1.17 PIC1.18 PIC1.21 PIC1.22 PIC1.23 PIC1.24 PIC1.27 PIC1.28 PIC1.29 PIC1.30 PIC1.33 PIC1.34 PIC1.36 PIC1.37 PIC1.42 PIC1.46 PIC1.47 PIC1.48 PIC1.49 PIC1.51 PIC1.52 PIC1.53 PIC1.54 PIC1.55 PIC1.59 PIC1.60 PIC1.61 PIC1.62 PIC1.63 PIC1.64 PIC_PROG_1.6 U1.1 U1.5 U1.7 U1.8 Vref_1.1

## Polygon pours and split planes (outlines as drawn)
+3V3 on Power (split plane): 5837.9,3588.68 5837.9,768.32 5095.68,26.1 4476.07,26.1 4476.07,583.76 4630.24,737.93 4631,737.93 4633.94,738.22 4636.28,738.93 4957,738.93 4959.94,739.22 4962.77,740.07 4965.37,741.47 4967.66,743.34 5135.66,911.34 5137.53,913.63 5138.93,916.23 5139.78,919.06 5140.07,922 5140.07,2195 5139.78,2197.94 5138.93,2200.77 5137.53,2203.37 5135.66,2205.66 4931.66,2409.66 4929.37,2411.53 4926.77,2412.93 4923.94,2413.78 4921,2414.07 23.1,2414.07 23.1,3589.68 773.32,4339.9 5086.68,4339.9
+5 on Power (split plane): 5109.93,2188.76 5109.93,928.24 4950.76,769.07 4632,769.07 4629.06,768.78 4626.72,768.07 4624,768.07 4621.06,767.78 4618.23,766.93 4615.63,765.53 4613.34,763.66 4450.34,600.66 4448.47,598.37 4447.07,595.77 4446.22,592.94 4445.93,590 4445.93,26.1 764.32,26.1 23.1,767.32 23.1,2383.93 4914.76,2383.93
GND_L on Ground (split plane): 5837.9,3588.68 5837.9,768.32 5095.68,26.1 4477.07,26.1 4477.07,587.76 4628.24,738.93 4957,738.93 4959.94,739.22 4962.77,740.07 4965.37,741.47 4967.66,743.34 5134.66,910.34 5136.53,912.63 5137.93,915.23 5138.78,918.06 5139.07,921 5139.07,2197 5138.78,2199.94 5137.93,2202.77 5136.53,2205.37 5134.66,2207.66 4935.66,2406.66 4933.37,2408.53 4930.77,2409.93 4927.94,2410.78 4925,2411.07 23.1,2411.07 23.1,3589.68 773.32,4339.9 5086.68,4339.9
GND_H on Ground (split plane): 5108.93,2190.76 5108.93,927.24 4950.76,769.07 4622,769.07 4619.06,768.78 4616.23,767.93 4613.63,766.53 4611.34,764.66 4451.34,604.66 4449.47,602.37 4448.07,599.77 4447.22,596.94 4446.93,594 4447.08,592.5 4446.93,591 4446.93,26.1 764.32,26.1 23.1,767.32 23.1,2380.93 4918.76,2380.93

## Keep-outs
Top Layer:
  lines w20: 312,3273 1020.84,3273 ; 313.18,3274.59 313.18,3506.59 ; 313.18,3505 1018.41,3505 ; 1021.41,3502 1021.41,3272.43 1023.84,3270
  lines w30: 0,2399 4922,2399 5124,2197 5124,921 4955,752 4620,752 4462,594 4462,1
Bottom Layer:
  lines w30: 0,2398 4922,2398 5123,2197 5123,920 4956,753 4620,753 4462,595 4462,0

## Other copper
Power (plane layer: these items are gaps in the copper):
  lines w30: 0,2399 4921,2399 5125,2195 5125,922 4957,754 4632,754 4631,753 4624,753 4461,590 4461,17
Ground (plane layer: these items are gaps in the copper):
  lines w30: 0,2396 4925,2396 5124,2197 5124,921 4957,754 4622,754 4462,594 ; 4462,2 4462,591